# Altium PCB PCB-ThermalType-STM32.PcbDoc
Units mil, origin at the board's own origin, x right, y up, seen from the top; angles counter-clockwise.
Board outline 1800 x 1940 mil, 2 copper layers (Top Layer, Bottom Layer), stack 61.756 mil thick; 40 components, 48 nets, 237 pads, 0 vias.
Unrouted connection lines stored in the file: 141.
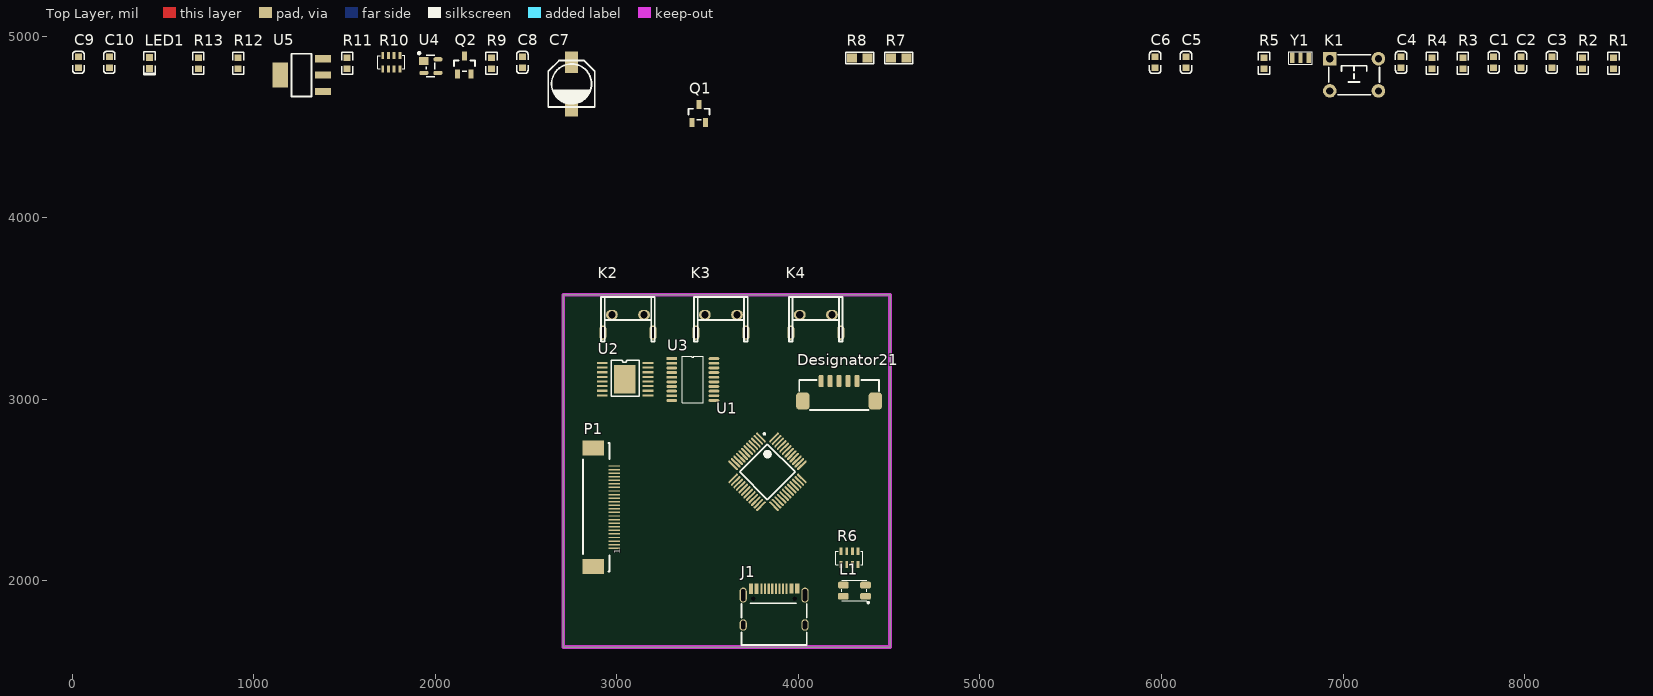
[diagram p0: Top Layer view]
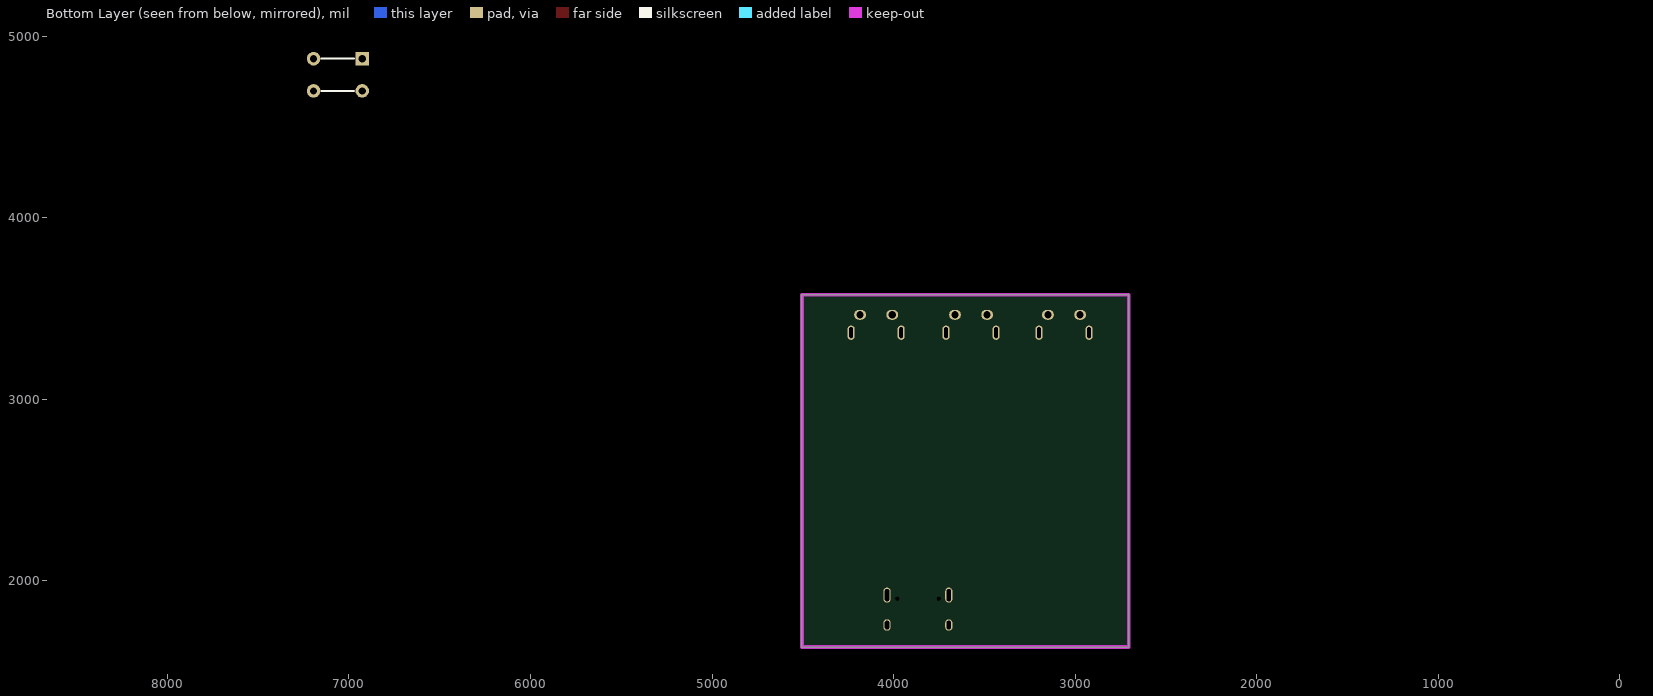
[diagram p1: Bottom Layer view, seen from below]

## Layer stack, top to bottom
Top Solder: solder mask 1, SM-001, Dk 4
Top Layer: signal copper 1.378
Dielectric 1: core 59, Core-043, Dk 4.3
Bottom Layer: signal copper 1.378
Bottom Solder: solder mask 1, SM-001, Dk 4

## Board outline
2705,1635 4505,1635 4505,3575 2705,3575

## Design rules (kind name [scope] priority, off if disabled: settings)
Clearance [All] p1: gap=6 ignorepadtopadclearanceinfootprint=TRUE
PolygonConnect [All] p1 off: connectstyle=Relief reliefconductorwidth=10 reliefentries=4 polygonreliefangle="90 Angle" airgapwidth=10
RoutingVias [All] p1: holewidth=28 width=50 viastyle="Through Hole" minholewidth=28 minwidth=50 maxholewidth=28 maxwidth=50
SolderMaskExpansion [All] p1: expansion=4 istentingtop=FALSE
Width [All] p1: maxlimit=200 minlimit=10 preferedwidth=10
30 further rules are at their usual default settings.

## Components (designator, comment, footprint, x,y, rotation, side; value= is the part's Value field where it differs from the comment)
C1 "104" 0603c 7830.91,4860 r0 top
C2 "104" 0603c 7980.91,4860 r0 top
C3 "104" 0603c 8150.91,4860 r0 top
C4 "104" 0603c 7320.91,4860 r0 top
C5 "2.2uF" 0603C 6135.91,4860 r0 top
C6 "104" 0603C 5965.91,4860 r0 top
C7 "100uF/16v" ECAP_V 2750.91,4735 r90 top
C8 "104" 0603C 2480.91,4860 r0 top
C9 "104" 0603C 35.91,4860 r0 top
C10 "10uF" 0603C 205.91,4860 r0 top
Designator21 "Comment" sh1.25_LT_5P 4322.64,3100 r180 top
J1 "USB-TYPEC-16P" USB-TYPEC-16P 3865.71,1756.31 r270 top
K1 "KEY" KEY 7060.91,4785 r0 top
K2 "侧脚6*6*X微动按键" 侧脚6*6*X微动按键 3051.57,3366.57 r180 top
K3 "侧脚6*6*X微动按键" 侧脚6*6*X微动按键 3563.74,3366.57 r180 top
K4 "侧脚6*6*X微动按键" 侧脚6*6*X微动按键 4086.57,3366.57 r180 top
L1 "RGB_3512" RGB_3528 4253.86,1976.02 r0 top
LED1 "0603LED" 0603LED 425.91,4850 r90 top
P1 "PT48D-HLV" PT48D-HLV 2875,2169.41 r180 top
Q1 "CJ2333" CJ2333 3452.34,4623.31 r0 top
Q2 "2N7002" 2N7002 2160.91,4890 r0 top
R1 "51K,1%" 0603r 8490.91,4850 r0 top
R2 "10K" 0603r 8320.91,4850 r0 top
R3 "200R" 0603r 7660.91,4850 r0 top
R4 "22K" 0603r 7490.91,4850 r0 top
R5 "10k" 0603r 6565.91,4850 r0 top
R6 "1K" 0603RES 4285,2130 r0 top
R7 "0R6" 0805R 4555.91,4880 r0 top
R8 "0R6" 0805R 4340.91,4880 r0 top
R9 "10K" 0603r 2310.91,4850 r0 top
R10 "1K" 0603RES 1760.91,4860 r0 top
R11 "100K" 0603r 1515.91,4850 r0 top
R12 "4.7K" 0603r 915.91,4850 r0 top
R13 "1.5K" 0603r 695.91,4850 r0 top
U1 "STM32F103C8T6" STM-LQFP48_N 3830,2600 r315 top
U2 "DRV8833" DRV8833 3050,3115 r180 top
U3 "74LVC245A" TSSOP20 3302.72,3223.54 r0 top
U4 "PRTR5V0U2X" SOT-143 1975.91,4835 r0 top
U5 "AMS1117_3V3" AMS1117_SOT223 1260.91,4790 r0 top
Y1 "XTAL-8M" XTAL_8M 6765.91,4880 r0 top

## Footprints (in the part's own frame and the unit in brackets; to place one, negate y for a bottom-side part, rotate by r counter-clockwise, add the part's x,y. Pads: shape width x height; smd on the part's side, far side on the other; paste and mask are expansions set on the pad)
2N7002 [mm]
  rect 0.7x1.25 smd: 1(-0.95,-2.5) 2(0.95,-2.5) 3(0,0)
  silkscreen extent -1.46,-2.15 1.46,-0.6, body extent -1.5,-2.75 1.5,0.25, height 1.3
0603c [mm]
  rect 0.98x0.93 smd: 1(-0.022,0.651) 2(-0.022,-0.889)
  silkscreen extent -0.81,-1.65 0.77,1.42, body extent -0.42,-0.92 0.38,0.68, height 0.3
0603C [mm]
  rect 0.98x0.93 smd: 1(-0.022,0.651) 2(-0.022,-0.889)
  silkscreen extent -0.81,-1.65 0.77,1.42, body extent -0.42,-0.92 0.38,0.68, height 0.3
0603LED [mm]
  rect 0.93x0.98 smd: 1(0.821,0) 2(-0.719,0)
  silkscreen extent -1.63,-0.79 1.59,0.79, body extent -0.75,-0.39 0.85,0.41, height 0.61
0603r [mm]
  rect 0.98x0.93 smd: 1(-0.025,-0.744) 2(-0.025,0.796)
  silkscreen extent -0.82,-1.51 0.76,1.56, body extent -0.43,-0.82 0.37,0.88, height 0.56
0603RES [mm]
  rect 0.4x1 smd: 1(-1.272,-1.034) 2(-0.472,-1.034) 3(0.328,-1.034) 4(1.128,-1.034) 5(1.128,0.824) 6(0.328,0.824) 7(-0.472,0.824) 8(-1.272,0.824)
  silkscreen extent -1.98,-1.03 1.78,0.85, body extent -1.7,-0.9 1.5,0.7, height 0.59
0805R [mil]
  rect 55.12x50 smd: 1(-46.01,-1) 2(41,-1)
  silkscreen extent -80,-33 75,32, body extent -45,-26 37,28, height 26
AMS1117_SOT223 [mm]
  rect 2.2x1 smd: 1(3.076,-2.427) 2(3.076,-0.127) 3(3.076,2.173)
  rect 2.2x3.5 smd: 4(-2.924,-0.127)
  silkscreen extent -1.32,-3.13 1.48,2.87, body extent -3.41,-3.37 3.57,3.12, height 1.64
CJ2333 [mm]
  rect 0.7x1.25 smd: 1(-0.949,-2.497) 2(0.951,-2.497) 3(0.001,0.003)
  silkscreen extent -1.46,-2.15 1.46,-0.6, body extent -1.5,-2.75 1.5,0.25, height 1.3
DRV8833 [mm]
  rect 1.5x0.3 smd: 1(3.302,-2.159) 2(3.302,-1.509) 3(3.302,-0.859) 4(3.302,-0.209) 5(3.302,0.441) 6(3.302,1.091) 7(3.302,1.741) 8(3.302,2.391) 9(-3.098,2.391) 10(-3.098,1.741) 11(-3.098,1.091) 12(-3.098,0.441) 13(-3.098,-0.209) 14(-3.098,-0.859) 15(-3.098,-1.509) 16(-3.098,-2.159)
  rect 3x4 smd: 13(0.127,0.127)
  silkscreen extent -1.91,-2.54 2.03,2.54
ECAP_V [mm]
  rect 3x1.8 smd: 1(3.095,0) 2(-2.993,0)
  silkscreen extent -3.2,-3.25 3.3,3.25, body extent -3.75,-3.25 3.55,3.35, height 5.9
KEY [mm]
  rect 1.9x1.9 hole 1: 1(-3.4,2.301)
  round 1.9 hole 1: 1(3.4,2.301) 2(-3.4,-2.199) 2(3.4,-2.199)
  silkscreen extent -3.56,-2.74 3.56,2.84, body extent -4.11,-2.95 4.11,3.05, height 6.95
PT48D-HLV [mm]
  rect 3x2.1 smd: 0(0.106,2.296) 0(0.106,-14.304)
  rect 1.6x0.2 smd: 1(-2.794,-0.254) 2(-2.794,-0.754) 3(-2.794,-1.254) 4(-2.794,-1.754) 5(-2.794,-2.254) 6(-2.794,-2.754) 7(-2.794,-3.254) 8(-2.794,-3.754) 9(-2.794,-4.254) 10(-2.794,-4.754) 11(-2.794,-5.254) 12(-2.794,-5.754) 13(-2.794,-6.254) 14(-2.794,-6.754) 15(-2.794,-7.254) 16(-2.794,-7.754) 17(-2.794,-8.254) 18(-2.794,-8.754) 19(-2.794,-9.254) 20(-2.794,-9.754) 21(-2.794,-10.254) 22(-2.794,-10.754) 23(-2.794,-11.254) 24(-2.794,-11.754)
  silkscreen extent -2.16,-14.99 1.56,3.02
RGB_3528 [mm] "4PIN共阳"
  rrect50% 1.5x0.95 smd: 1(2.95,-1.55) 2(-0.15,-1.55) 3(-0.15,0) 4(2.95,0)
  silkscreen extent -0.38,-2.56 3.46,0.65, body extent -0.38,-2.17 3.12,0.63, height 1.75
sh1.25_LT_5P [mm]
  rrect50% 1.9x2.4 smd: 0(-2.575,2.8) 0(7.57,2.8)
  rrect50% 0.7x1.7 smd: 1(0,0) 2(1.25,0) 3(2.5,0) 4(3.75,0) 5(5,0)
  silkscreen extent -3.07,-0.14 8.06,4.06
SOT-143 [mm]
  rect 1.3x1.1 smd: 1(-1.009,0.7)
  oval 1.3x0.6 smd: 2(-0.969,-0.96) 3(0.991,-0.96) 4(0.991,0.94)
  silkscreen extent -1.79,-1.5 0.56,1.96, body extent -1.2,-1.47 1.22,1.45, height 1
STM-LQFP48_N [mm] "QFP, 48-Leads, Body 7x7mm, Pitch 0.5mm, IPC Medium Density"
  oval 1.8x0.3 smd: 1(-4.05,2.75) 2(-4.05,2.25) 3(-4.05,1.75) 4(-4.05,1.25) 5(-4.05,0.75) 6(-4.05,0.25) 7(-4.05,-0.25) 8(-4.05,-0.75) 9(-4.05,-1.25) 10(-4.05,-1.75) 11(-4.05,-2.25) 12(-4.05,-2.75) 25(4.05,-2.75) 26(4.05,-2.25) 27(4.05,-1.75) 28(4.05,-1.25) 29(4.05,-0.75) 30(4.05,-0.25) 31(4.05,0.25) 32(4.05,0.75) 33(4.05,1.25) 34(4.05,1.75) 35(4.05,2.25) 36(4.05,2.75)
  oval 0.3x1.8 smd: 13(-2.75,-4.05) 14(-2.25,-4.05) 15(-1.75,-4.05) 16(-1.25,-4.05) 17(-0.75,-4.05) 18(-0.25,-4.05) 19(0.25,-4.05) 20(0.75,-4.05) 21(1.25,-4.05) 22(1.75,-4.05) 23(2.25,-4.05) 24(2.75,-4.05) 37(2.75,4.05) 38(2.25,4.05) 39(1.75,4.05) 40(1.25,4.05) 41(0.75,4.05) 42(0.25,4.05) 43(-0.25,4.05) 44(-0.75,4.05) 45(-1.25,4.05) 46(-1.75,4.05) 47(-2.25,4.05) 48(-2.75,4.05)
  silkscreen extent -4.17,-2.75 2.75,3.57, body extent -3.5,-3.5 3.5,3.5, height 1.6
TSSOP20 [mm]
  rect 1.5x0.4 smd: 1(0,0)
  oval 1.5x0.4 smd: 2(0,-0.65) 3(0,-1.3) 4(0,-1.95) 5(0,-2.6) 6(0,-3.25) 7(0,-3.9) 8(0,-4.55) 9(0,-5.2) 10(0,-5.85) 11(5.9,-5.85) 12(5.9,-5.2) 13(5.9,-4.55) 14(5.9,-3.9) 15(5.9,-3.25) 16(5.9,-2.6) 17(5.9,-1.95) 18(5.9,-1.3) 19(5.9,-0.65) 20(5.9,0)
  silkscreen extent 1.48,-6.18 4.42,0.33
USB-TYPEC-16P [mm]
  round 0 hole 0.65: 0(-3.65,2.903) 0(-3.65,-2.877)
  oval 2.1x1 hole 0.6 slot 1.7 at 0 deg: 1(-4.18,4.333) 1(-4.18,-4.307)
  oval 1.6x1 hole 0.6 slot 1.2 at 0 deg: 1(0,4.333) 1(0,-4.307)
  rect 1.45x0.3 smd: A1(-5.092,-3.362) A4(-5.092,-2.587) A5(-5.092,-1.237) A6(-5.092,-0.237) A7(-5.092,0.263) A8(-5.092,-1.737) A9(-5.1,2.613) A12(-5.1,3.388) B1(-5.1,3.088) B4(-5.1,2.313) B5(-5.092,1.763) B6(-5.092,0.763) B7(-5.092,-0.737) B8(-5.092,1.263) B9(-5.092,-2.287) B12(-5.092,-3.062)
  silkscreen extent -3.05,-4.56 2.79,4.59, body extent -5.3,-4.46 2.6,4.48, height 3.25
XTAL_8M [mm]
  rect 0.6x1.45 smd: 1(-1.168,0) 2(1.168,0) 3(0,0)
  silkscreen extent -1.65,-0.89 1.65,0.89, body extent -1.61,-0.76 1.59,0.76, height 0.7
侧脚6*6*X微动按键 [mm]
  oval 1x2 hole 0.5 slot 1.5 at 90 deg: 0(-3.75,0) 0(3.25,0)
  oval 1.651x1.397 hole 1: 1(-2.5,-2.5) 2(2,-2.5)
  silkscreen extent -4,-5 3.5,1.25, body extent -4.72,-6.87 4.22,0.97, height 7.1

## Part data
C1 C2 C3 C4: library part 0603c
C5 C6 C8: library part 0603C, "电容"
C7: library part ECAP, "电容"
C9 C10: library part 0603C
Q1: "P-MOS"
Q2: library part NMOS-2, "N-Channel Power MOSFET", Code_JEDEC=TO-220-AB, ComponentLink1Description="Manufacturer Link", ComponentLink1URL=http://www.irf.com/, DatasheetDocument=PD-9.814, LatestRevisionDate=17-Jul-2002, LatestRevisionNote="Re-released for DXP Platform.", Note="Pin 2 is electrically connected to pin 4.", PackageReference=TO-220AB, Published=8-Jun-2000, Publisher="Altium Limited"
R1 R2 R3 R4 R9 R11: library part 0603R, "电阻"
R5: library part 0603r
R6: library part 0603RES
R7 R8: library part 0805R, "电阻"
R10: library part 0603RES, "排阻"
R12 R13: library part 0603R
U1: "ARM Cortex-M3 32-bit MCU, 64 KB Flash, 20 KB Internal RAM, 37 I/Os, 48-pin LQFP, -40 to 85 degC, Tray", I/Os (High Current)=37, Operating Frequency(F) (Processor speed) (MHz)=72, Supplier Part Number 1=497-6063-ND, Supply Voltage(Vcc) min (V)=2, A/D Converter="2x12-bit (10 Channel)", ComponentLink1Description="Manufacturer URL", ComponentLink1URL=http://www.st.com/web/en/home.html, ComponentLink2Description=Datasheet, ComponentLink2URL=http://www.st.com/st-web-ui/static/active/en/resource/technical/document/datasheet/CD00161566.pdf, ComponentLink3Description="Package Specification", ComponentLink3URL=http://www.st.com/st-web-ui/static/active/en/resource/technical/document/datasheet/DM00058181.pdf, Core="ARM Cortex-M3", DatasheetVersion="Rev. 16", FLASH Size (Prog) (kB)=64, Internal RAM Size (kB)=20, Mounting Technology="Surface Mount", PackageDescription="48-Pin Low Profile Quad Flat Package, 7 x 7 mm Body, 0.5 mm Pitch", PackageReference=LQFP48, PackageVersion="Rev. 6, 06/2013", Packing=Tray, PartNumber=STM32F103C8T6, Supplier 1=Digi-Key, Supplier 2=Farnell, Supplier 3=Newark, Supplier 4=Newark, Supplier 5=Mouser, Supplier Part Number 2=1447637, Supplier Part Number 3=59M2182, Supplier Part Number 4=57P1222, Supplier Part Number 5=511-STM32F103C8T6
U3: "8通道隔离芯片"
U4: "超低容值轨对轨静电放电保护二极管,主要保护两条高速数据或者高频率信号线免受静电放电和其他瞬变的影响"
U5: library part AMS1117
Y1: "晶振"

## Nets (pads, with @x,y where several pads share a name; then routed paths per layer and width w, separated by ;. In a path a pad name is that pad's centre, name@x,y a point inside that pad or via, vN(x,y) a via of type N, cw(c..) or ccw(c..) an arc to the next point about the centre after c; other vN are vias at no path point)
GND: C1.1 C2.1 C3.1 C4.2 C5.1 C7.2 C8.2 C9.1 C10.1 J1.A1 J1.A12 J1.B1 J1.B12 K1.2 K2.1 K3.1 K4.1 LED1.2 P1.2 P1.9 P1.10 P1.11 P1.15 P1.16 P1.17 Q2.2 R2.2 R7.2 R8.2 R10.1 R10.2 R10.3 R10.4 R11.1 U1.8 U1.23 U1.35 U1.44 U1.47 U2.13 U3.1 U3.6 U3.7 U3.8 U3.9 U3.10 U3.11 U3.12 U3.13 U3.14 U3.19 U4.1 U5.1 Y1.3
MCU-PWM0: R10.5 U1.10 U3.18
MCU-PWM1: R10.6 U1.11 U3.17
MCU-PWM2: R10.7 U1.12 U3.16
MCU-PWM3: R10.8 U1.13 U3.15
MOTOR-CH1: P1.21 U2.2
MOTOR-CH2: P1.22 U2.4
MOTOR-CH3: P1.23 U2.7
MOTOR-CH4: P1.24 U2.5
NetC4_1: C4.1 K1.1 R5.1 U1.7
NetC5_2: C5.2 U2.14
NetC6_1: C6.1 U2.11
NetL1_1: L1.1 R6.3
NetL1_3: L1.3 R6.1
NetL1_4: L1.4 R6.2
NetLED1_1: LED1.1 R12.2
NetP1_3: P1.3 R3.1
NetQ1_1: Q1.1 Q2.3 R9.2
NetR7_1: R7.1 U2.3
NetR8_1: R8.1 U2.6
NetU1_5: U1.5 Y1.1
NetU1_6: U1.6 Y1.2
PAPER_SNS: P1.1 R4.1 U1.16
POWER: Q1.3 R9.1
PRN_LATCH: P1.18 U1.19
PRN_MOSI: P1.7 U1.17
PRN_POWER: Q2.1 R11.2 U1.20 U2.1
PRN_SCLK: P1.8 U1.15
PRN_STROBE: P1.13 R2.1 U1.18
PRN_TEMP: P1.14 R1.1 U1.14
PWM-CH1-A: U2.16 U3.2
PWM-CH1-B: U2.15 U3.3
PWM-CH2-A: U2.9 U3.4
PWM-CH2-B: U2.10 U3.5
SWCLK: U1.37
SWDIO: U1.34
USB-N: J1.A7 J1.B7 U1.32 U4.2
USB-P: J1.A6 J1.B6 R13.2 U1.33 U4.3
USER-LED-B: R6.8 U1.29
USER-LED-G: R6.7 U1.30
USER-LED-R: R6.6 U1.31
USER_KEY1: K2.2 U1.41
USER_KEY2: K3.2 U1.42
USER_KEY3: K4.2 U1.43
VCC3V3: C1.2 C2.2 C3.2 C8.1 C9.2 C10.2 L1.2 P1.12 R1.2 R3.2 R4.2 R5.2 R12.1 R13.1 U1.1 U1.9 U1.24 U1.36 U1.48 U3.20 U5.2 U5.4
VCC5V: U5.3
VCCUSB: J1.A4 J1.A9 J1.B4 J1.B9 U4.4
VPRT: C6.2 C7.1 P1.4 P1.5 P1.6 P1.19 P1.20 Q1.2 U2.12
pads on no net: Designator21.0 Designator21.1 Designator21.2 Designator21.3 Designator21.4 Designator21.5 J1.0 J1.1 J1.A5 J1.A8 J1.B5 J1.B8 K2.0 K3.0 K4.0 P1.0 R6.4 R6.5 U1.2 U1.3 U1.4 U1.21 U1.22 U1.25 U1.26 U1.27 U1.28 U1.38 U1.39 U1.40 U1.45 U1.46 U2.8

## Keep-outs
Keep-Out Layer:
  the board outline again, w20

## Text inside footprints (layer, text, board x,y; h text height)
P1: Top Overlay "1" at 3015,2149.41 h30 r90